# Altium PCB PCB2.PcbDoc
Units mm, origin at the board's own origin, x right, y up, seen from the top; angles counter-clockwise.
Board outline 50.16 x 65.02 mm, 2 copper layers (Top Layer, Bottom Layer), stack 1.671 mm thick; 3 components, 49 nets, 99 pads, 0 vias.
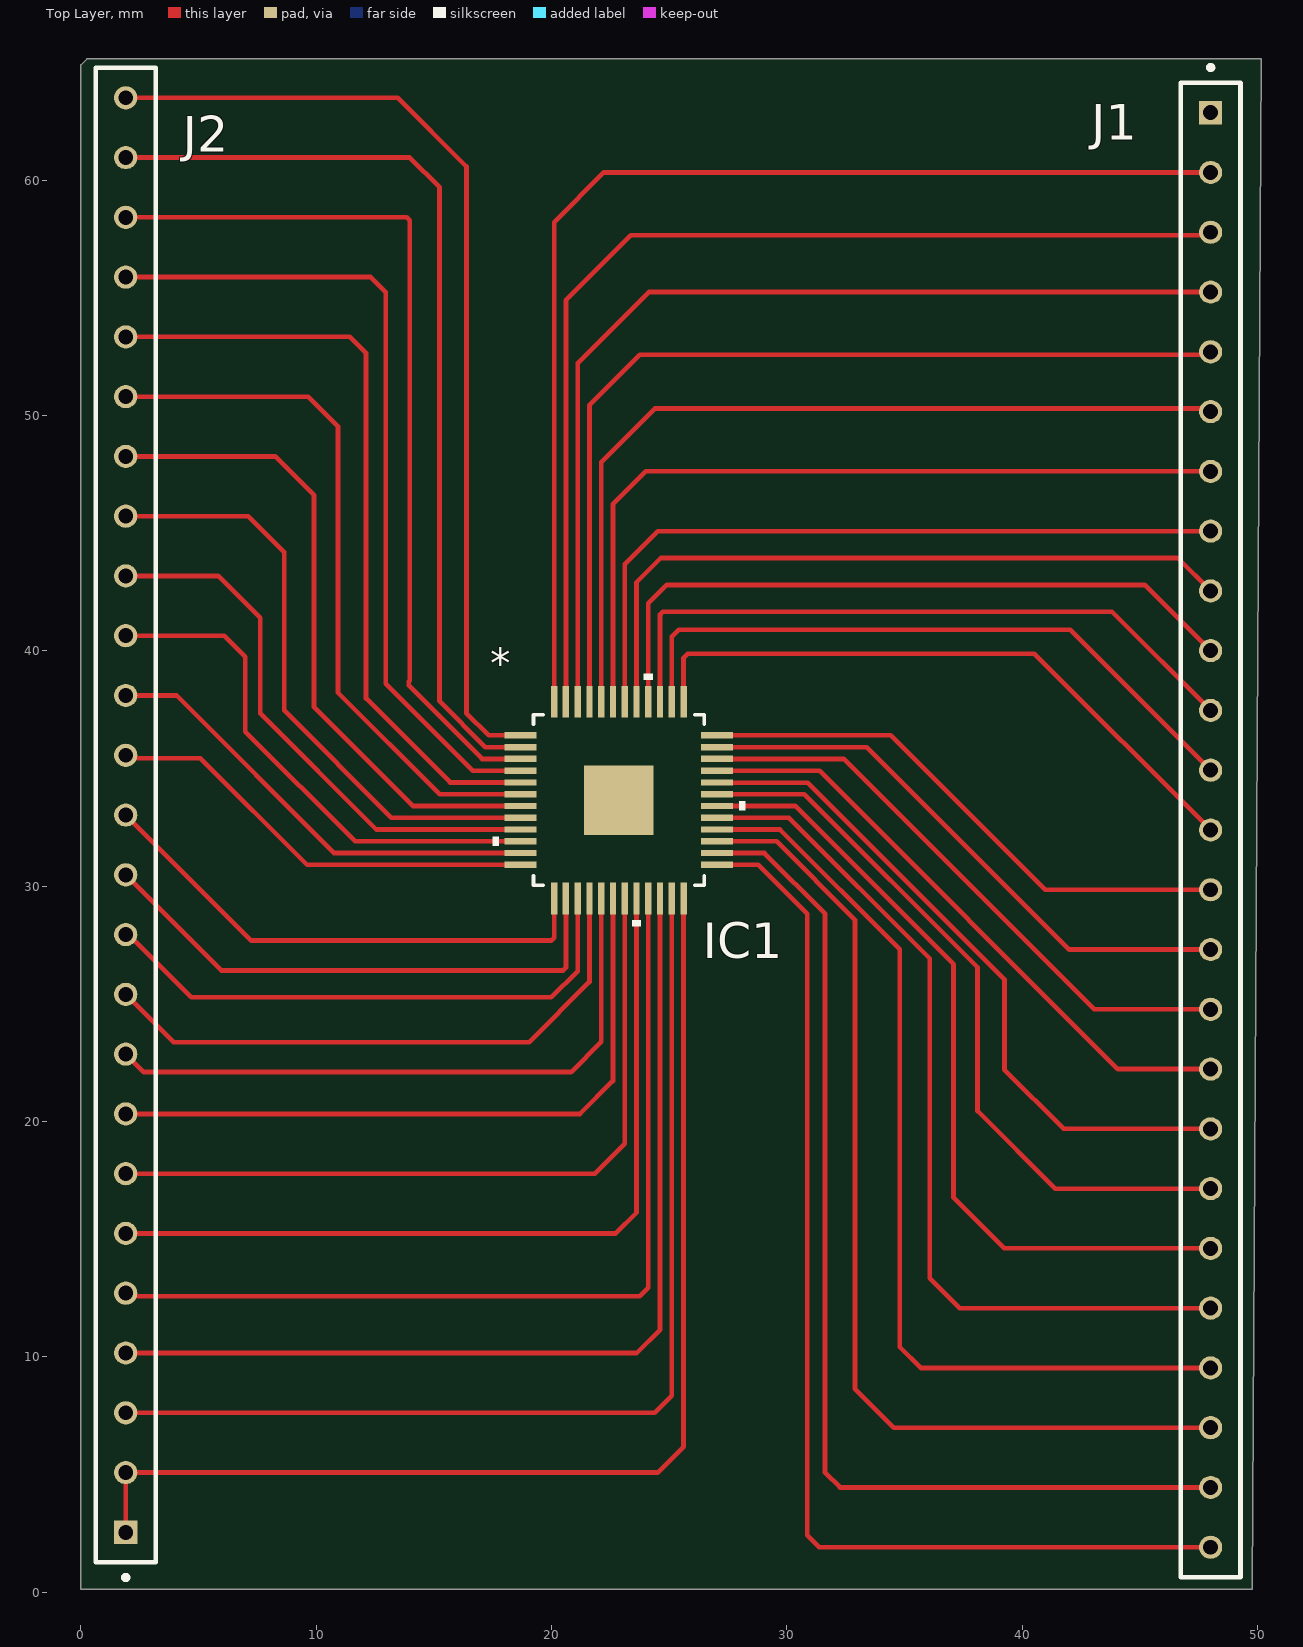
[diagram p0: Top Layer view]
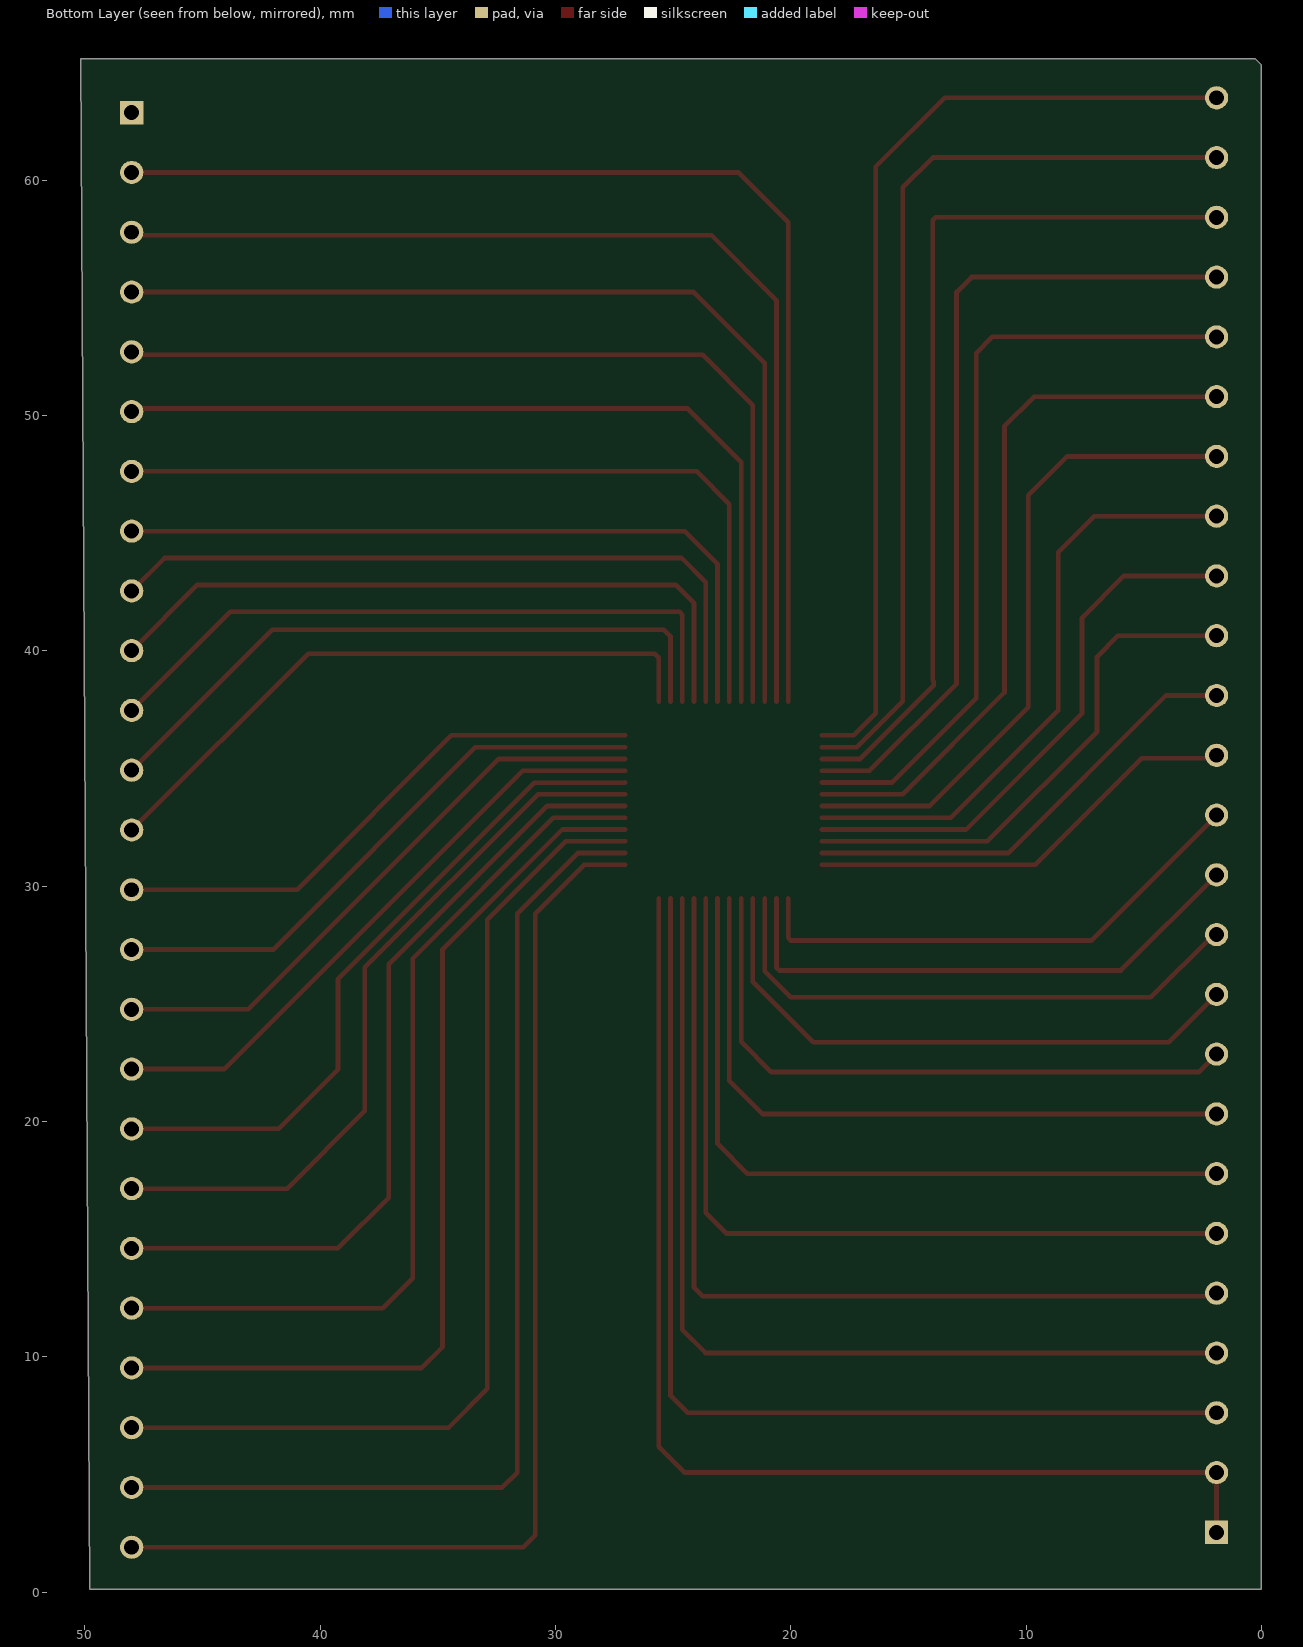
[diagram p1: Bottom Layer view, seen from below]

## Layer stack, top to bottom
Top Solder: solder mask 0.0102, Solder Resist, Dk 3.5
Top Layer: signal copper 0.0356
Dielectric 1: dielectric 1.6, FR-4, Dk 4.8
Bottom Layer: signal copper 0.0356
Bottom Solder: solder mask 0.0102, Solder Resist, Dk 3.5

## Board outline
50.165,65.151 0.254,65.151 0,64.897 0,0.127 49.784,0.127

## Design rules (kind name [scope] priority, off if disabled: settings)
Clearance [All] p1: gap=0.254 ignorepadtopadclearanceinfootprint=TRUE
MinimumSolderMaskSliver [InPadClass('All Pads') vs OnLayer('Top Paste')] p1: minsoldermaskwidth=0.254
PolygonConnect [All] p1: connectstyle=Relief reliefconductorwidth=0.254 reliefentries=4 polygonreliefangle="90 Angle" airgapwidth=0.254
RoutingVias [All] p1: holewidth=0.3 width=0.6 viastyle="Through Hole" minholewidth=0.3 minwidth=0.6 maxholewidth=0.3 maxwidth=0.6
SolderMaskExpansion [All] p1: expansion=0.102 istentingtop=FALSE
Width [All] p1: maxlimit=0.254 minlimit=0.2 preferedwidth=0.2
29 further rules are at their usual default settings.

## Components (designator, comment, footprint, x,y, rotation, side; value= is the part's Value field where it differs from the comment)
IC1 "IC" LQFP-48_LXE_LIT 22.86,33.655 r0 top
J1 "Header" SAMTEC_TS-125-G-A 48.006,32.385 r270 top
J2 "Header" SAMTEC_TS-125-G-A 1.905,33.02 r90 top

## Footprints (in the part's own frame and the unit in brackets; to place one, negate y for a bottom-side part, rotate by r counter-clockwise, add the part's x,y. Pads: shape width x height; smd on the part's side, far side on the other; paste and mask are expansions set on the pad)
LQFP-48_LXE_LIT [mm]
  rect 1.356x0.27 smd paste+0 mask+0: 1(-4.178,2.75) 2(-4.178,2.25) 3(-4.178,1.75) 4(-4.178,1.25) 5(-4.178,0.75) 6(-4.178,0.25) 7(-4.178,-0.25) 8(-4.178,-0.75) 9(-4.178,-1.25) 10(-4.178,-1.75) 11(-4.178,-2.25) 12(-4.178,-2.75) 25(4.178,-2.75) 26(4.178,-2.25) 27(4.178,-1.75) 28(4.178,-1.25) 29(4.178,-0.75) 30(4.178,-0.25) 31(4.178,0.25) 32(4.178,0.75) 33(4.178,1.25) 34(4.178,1.75) 35(4.178,2.25) 36(4.178,2.75)
  rect 0.27x1.356 smd paste+0 mask+0: 13(-2.75,-4.178) 14(-2.25,-4.178) 15(-1.75,-4.178) 16(-1.25,-4.178) 17(-0.75,-4.178) 18(-0.25,-4.178) 19(0.25,-4.178) 20(0.75,-4.178) 21(1.25,-4.178) 22(1.75,-4.178) 23(2.25,-4.178) 24(2.75,-4.178) 37(2.75,4.178) 38(2.25,4.178) 39(1.75,4.178) 40(1.25,4.178) 41(0.75,4.178) 42(0.25,4.178) 43(-0.25,4.178) 44(-0.75,4.178) 45(-1.25,4.178) 46(-1.75,4.178) 47(-2.25,4.178) 48(-2.75,4.178)
  rect 2.96x2.96 smd paste-1.467 mask+0: EPAD(0,0)
  silkscreen extent -5.36,-5.36 5.36,5.36, body extent -4.5,-4.5 4.5,4.5, height 1.6
SAMTEC_TS-125-G-A [mm]
  rect 0.985x0.985 / inner round 0.985 / far side rect 0.985x0.985 hole 0.635: 01(-30.48,0)
  round 0.985 hole 0.635: 02(-27.94,0) 03(-25.4,0) 04(-22.86,0) 05(-20.32,0) 06(-17.78,0) 07(-15.24,0) 08(-12.7,0) 09(-10.16,0) 10(-7.62,0) 11(-5.08,0) 12(-2.54,0) 13(0,0) 14(2.54,0) 15(5.08,0) 16(7.62,0) 17(10.16,0) 18(12.7,0) 19(15.24,0) 20(17.78,0) 21(20.32,0) 22(22.86,0) 23(25.4,0) 24(27.94,0) 25(30.48,0)
  silkscreen extent -32.5,-1.27 31.75,1.27

## Nets (pads, with @x,y where several pads share a name; then routed paths per layer and width w, separated by ;. In a path a pad name is that pad's centre, name@x,y a point inside that pad or via, vN(x,y) a via of type N, cw(c..) or ccw(c..) an arc to the next point about the centre after c; other vN are vias at no path point)
NetIC1_1: IC1.1 J2.25 | length 41.8
  Top Layer w0.2: J2.25 13.462,63.5 16.383,60.579 16.383,37.352 17.33,36.405 IC1.1
  Top Layer w0.254: J2.25 J2.25@2.032,63.373
NetIC1_2: IC1.2 J2.24 | length 39.9
  Top Layer w0.2: J2.24 13.97,60.96 15.24,59.69 15.24,37.853 17.188,35.905 IC1.2
NetIC1_3: IC1.3 J2.23 | length 38
  Top Layer w0.2: J2.23 13.843,58.42 13.97,58.293 13.97,38.735 13.926,38.691 13.926,38.525 17.046,35.405 IC1.3
NetIC1_4: IC1.4 J2.22 | length 35.2
  Top Layer w0.2: J2.22 12.319,55.88 12.954,55.245 12.954,38.608 16.657,34.905 IC1.4
NetIC1_5: IC1.5 J2.21 | length 33.2
  Top Layer w0.2: J2.21 11.43,53.34 12.119,52.651 12.119,37.973 15.687,34.405 IC1.5
NetIC1_6: IC1.6 J2.20 | length 30.4
  Top Layer w0.2: J2.20 9.662,50.8 10.922,49.54 10.922,38.227 15.244,33.905 IC1.6
NetIC1_7: IC1.7 J2.19 | length 28.2
  Top Layer w0.2: J2.19 8.255,48.26 9.906,46.609 9.906,37.6 14.101,33.405 IC1.7
NetIC1_8: IC1.8 J2.18 | length 26
  Top Layer w0.2: J2.18 7.112,45.72 8.636,44.196 8.636,37.465 13.196,32.905 IC1.8
NetIC1_9: IC1.9 J2.17 | length 23.6
  Top Layer w0.2: J2.17 5.842,43.18 7.62,41.402 7.62,37.338 12.553,32.405 IC1.9
NetIC1_10: IC1.10 J2.16 | length 22.3
  Top Layer w0.2: J2.16 6.096,40.64 6.985,39.751 6.985,36.569 11.649,31.905 IC1.10
NetIC1_11: IC1.11 J2.15 | length 19.6
  Top Layer w0.2: J2.15 4.064,38.1 10.759,31.405 IC1.11
NetIC1_12: IC1.12 J2.14 | length 18.7
  Top Layer w0.2: J2.14 2.032,35.433 5.08,35.433 9.608,30.905 IC1.12
NetIC1_13: IC1.13 J2.13 | length 22.1
  Top Layer w0.2: J2.13 7.239,27.686 19.993,27.686 20.11,27.803 IC1.13
NetIC1_14: IC1.14 J2.12 | length 23.4
  Top Layer w0.2: J2.12 5.969,26.416 20.493,26.416 20.61,26.533 IC1.14
NetIC1_15: IC1.15 J2.11 | length 23.9
  Top Layer w0.2: J2.11 2.032,27.94 4.699,25.273 19.992,25.273 21.11,26.391 IC1.15
NetIC1_16: IC1.16 J2.10 | length 25.2
  Top Layer w0.2: J2.10 3.937,23.368 19.05,23.368 21.61,25.928 IC1.16
NetIC1_17: IC1.17 J2.09 | length 27.1
  Top Layer w0.2: J2.09 2.667,22.098 20.828,22.098 22.11,23.38 IC1.17
NetIC1_18: IC1.18 J2.08 | length 29
  Top Layer w0.2: J2.08 21.209,20.32 22.61,21.721 IC1.18
NetIC1_19: IC1.19 J2.07 | length 32.2
  Top Layer w0.2: J2.07 21.844,17.78 23.11,19.046 IC1.19
NetIC1_20: IC1.20 J2.06 | length 35.4
  Top Layer w0.2: J2.06 22.733,15.24 23.61,16.117 IC1.20
NetIC1_21: IC1.21 J2.05 | length 39
  Top Layer w0.2: J2.05 2.032,12.573 23.749,12.573 24.11,12.934 IC1.21
NetIC1_22: IC1.22 J2.04 | length 41.4
  Top Layer w0.2: J2.04 23.622,10.16 24.61,11.148 IC1.22
NetIC1_23: IC1.23 J2.03 | length 44.6
  Top Layer w0.2: J2.03 24.384,7.62 25.11,8.346 IC1.23
NetIC1_24: IC1.24 J2.01 J2.02 | length 50
  Top Layer w0.2: J2.01 J2.02 24.511,5.08 25.61,6.179 IC1.24
NetIC1_25: IC1.25 J1.25 | length 48.5
  Top Layer w0.2: IC1.25 28.785,30.905 30.861,28.829 30.861,2.413 31.369,1.905 J1.25
NetIC1_26: IC1.26 J1.24 | length 46
  Top Layer w0.2: IC1.26 29.047,31.405 31.623,28.829 31.623,5.08 32.258,4.445 J1.24
NetIC1_27: IC1.27 J1.23 | length 43
  Top Layer w0.2: IC1.27 29.563,31.905 32.893,28.575 32.893,8.636 34.544,6.985 J1.23
NetIC1_28: IC1.28 J1.22 | length 40.3
  Top Layer w0.2: IC1.28 29.705,32.405 34.798,27.312 34.798,10.414 35.687,9.525 J1.22
NetIC1_29: IC1.29 J1.21 | length 37.6
  Top Layer w0.2: IC1.29 30.087,32.905 36.068,26.924 36.068,13.335 37.338,12.065 J1.21
NetIC1_30: IC1.30 J1.20 | length 34.6
  Top Layer w0.2: IC1.30 30.349,33.405 37.084,26.67 37.084,16.764 39.243,14.605 J1.20
NetIC1_31: IC1.31 J1.19 | length 31.5
  Top Layer w0.2: IC1.31 30.738,33.905 38.1,26.543 38.1,20.447 41.402,17.145 J1.19
NetIC1_32: IC1.32 J1.18 | length 29.3
  Top Layer w0.2: IC1.32 27.049,34.394 30.891,34.394 39.243,26.042 39.243,22.2 41.758,19.685 J1.18
NetIC1_33: IC1.33 J1.17 | length 26.2
  Top Layer w0.2: IC1.33 31.389,34.905 44.069,22.225 J1.17
NetIC1_34: IC1.34 J1.16 | length 25.4
  Top Layer w0.2: IC1.34 32.413,35.405 43.053,24.765 J1.16
NetIC1_35: IC1.35 J1.15 | length 24.5
  Top Layer w0.2: IC1.35 33.399,35.905 41.999,27.305 J1.15
NetIC1_36: IC1.36 J1.14 | length 23.9
  Top Layer w0.2: IC1.36 34.419,36.405 40.979,29.845 J1.14 J1.14@48.006,30.099
NetIC1_37: IC1.37 J1.13 | length 27.4
  Top Layer w0.2: IC1.37 25.61,39.707 25.781,39.878 40.513,39.878 J1.13
NetIC1_38: IC1.38 J1.12 | length 28.3
  Top Layer w0.2: IC1.38 25.11,40.604 25.4,40.894 42.037,40.894 J1.12
NetIC1_39: IC1.39 J1.11 | length 28.9
  Top Layer w0.2: IC1.39 24.61,41.539 24.727,41.656 43.815,41.656 J1.11
NetIC1_40: IC1.40 J1.10 | length 29.6
  Top Layer w0.2: IC1.40 24.11,42.017 24.892,42.799 45.212,42.799 J1.10
NetIC1_41: IC1.41 J1.09 | length 30.5
  Top Layer w0.2: IC1.41 23.61,42.914 24.638,43.942 46.609,43.942 J1.09
NetIC1_42: IC1.42 J1.08 | length 31.3
  Top Layer w0.2: IC1.42 23.11,43.684 24.511,45.085 J1.08
NetIC1_43: IC1.43 J1.07 | length 34.4
  Top Layer w0.2: IC1.43 22.61,46.232 24.003,47.625 J1.07
NetIC1_44: IC1.44 J1.06 | length 37.1
  Top Layer w0.2: IC1.44 22.11,48.018 24.384,50.292 47.879,50.292 J1.06
NetIC1_45: IC1.45 J1.05 | length 39.9
  Top Layer w0.2: IC1.45 21.61,50.439 23.749,52.578 47.879,52.578 J1.05
NetIC1_46: IC1.46 J1.04 | length 42.5
  Top Layer w0.2: IC1.46 21.11,52.225 24.13,55.245 J1.04
NetIC1_47: IC1.47 J1.03 | length 45.7
  Top Layer w0.2: IC1.47 20.61,54.9 23.368,57.658 47.879,57.658 J1.03
NetIC1_48: IC1.48 J1.02 | length 49.1
  Top Layer w0.2: IC1.48 20.11,58.21 22.225,60.325 J1.02
NetIC1_49: J1.01
pads on no net: IC1.EPAD

## Text inside footprints (layer, text, board x,y; h text height)
IC1: Top Overlay "*" at 17.399,38.862 h1.27; Mechanical 13 "*" at 19.424,36.02 h1.27